# Altium PCB EsoCore_Edge.PcbDoc (part 5 of 6)
Units mil, origin at the board's own origin, x right, y up, seen from the top; angles counter-clockwise.
Board outline 6732.28 x 3385.83 mil, 4 copper layers (Top Layer, Layer 1, Layer 2, Bottom Layer), stack 61.58 mil thick; 330 components, 239 nets, 1236 pads, 712 vias.
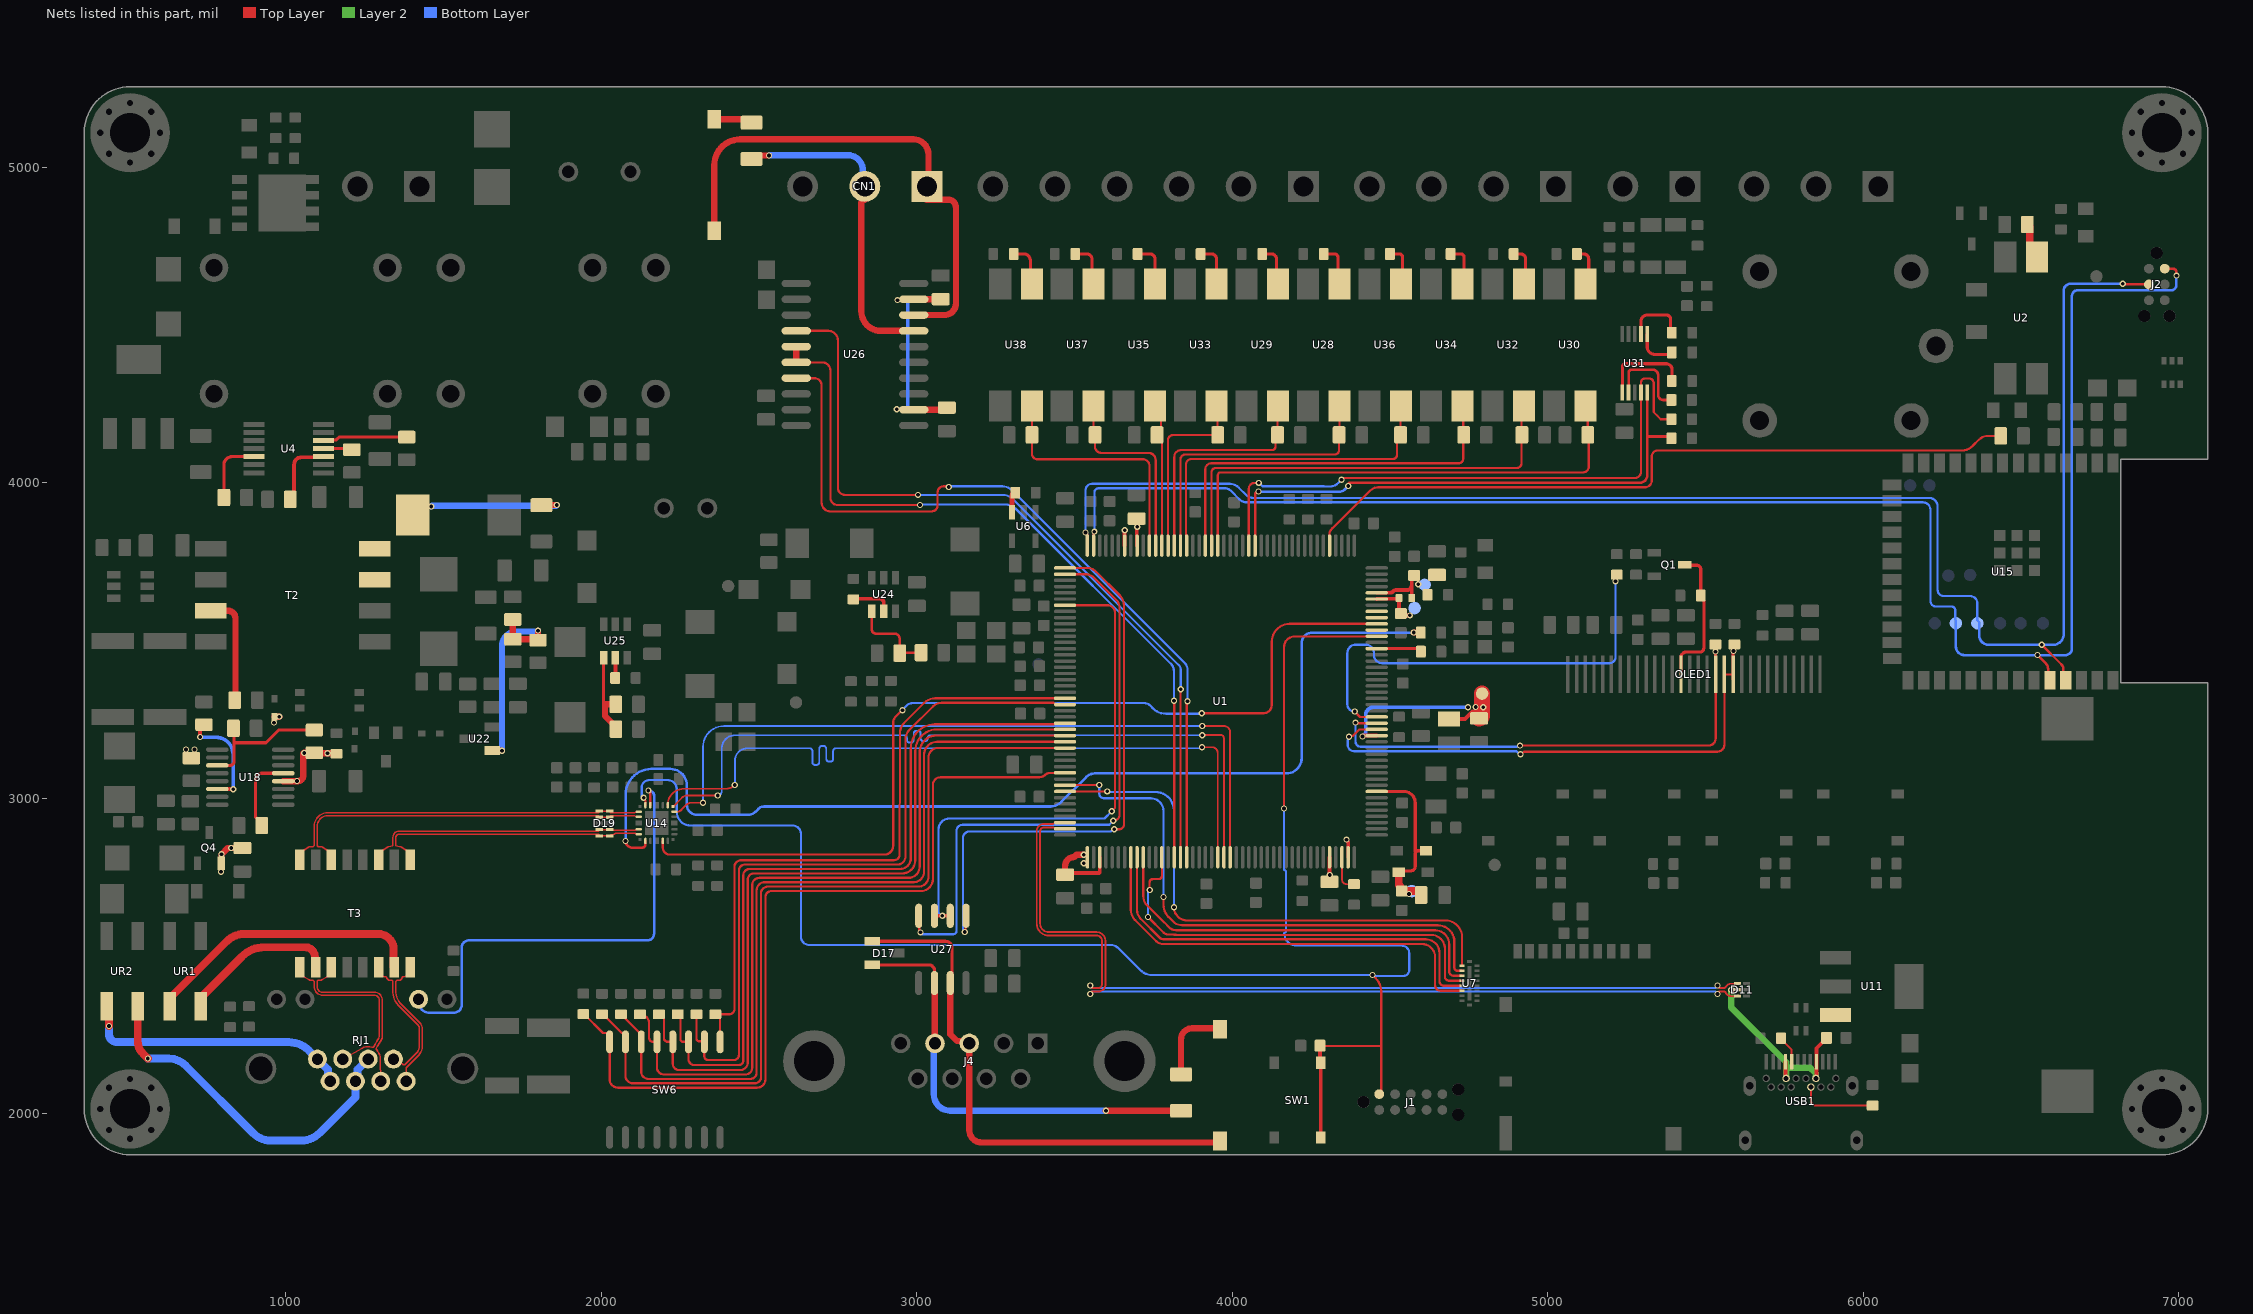
[diagram p6: the nets of this part, all layers, seen from the top]

## Via types
v1: diameter 19.68, hole 11.81, Top Layer to Bottom Layer, tented both sides, 712 vias

## Nets (pads, with @x,y where several pads share a name; then routed paths per layer and width w, separated by ;. In a path a pad name is that pad's centre, name@x,y a point inside that pad or via, vN(x,y) a via of type N, cw(c..) or ccw(c..) an arc to the next point about the centre after c; other vN are vias at no path point) (continued)
NetR26_2: R26.2 U14.13 | length 3374.7
  Top Layer w8: v1(2076.8,2864.7) ccw(c2097.8,2864.7) 2097.8,2843.7 2129.2,2843.7 ccw(c2129.2,2854.23) 2139.73,2854.23 U14.13@2139.73,2865.08
  Top Layer w10: R26.2@4597.49,3525.42 R26.2@4597.57,3525.34
  Top Layer w20: v1(4575.59,3525.5) 4597.57,3525.5 R26.2@4597.57,3525.34
  Bottom Layer w8: v1(2076.8,2864.7) 2076.8,3011.2 cw(c2158.62,3011.2) 2158.62,3093.02 2218.58,3093.02 cw(c2218.58,3040.54) 2271.06,3040.54 2271.06,2979.44 ccw(c2303.1,2979.44) 2303.1,2947.4 2465.16,2947.4 ccw(c2465.16,2979.84) 2488.1,2956.9 2497.6,2966.4 cw(c2516.19,2947.81) 2516.19,2974.1 3423.83,2974.1 ccw(c3423.83,3022.07) 3457.75,2988.15 3537.3,3067.7 cw(c3564.45,3040.55) 3564.45,3078.95 4170.85,3078.95 ccw(c4170.85,3128.1) 4220,3128.1 4220,3491.9 cw(c4253.6,3491.9) 4253.6,3525.5 v1(4575.59,3525.5)
NetR30_2: R30.2 U1.20 | length 1428.3
  Top Layer w7: v1(4388,3275) 4405.12,3257.88 U1.20@4457.93,3257.88
  Bottom Layer w7: v1(4388,3275) cw(c4388,3298.34) 4378.85,3276.87 cw(c4388,3298.34) 4364.66,3298.34 4364.66,3460 cw(c4391.66,3460) 4391.66,3487 4423.06,3487 cw(c4423.06,3461.06) 4449,3461.06 4449,3454.73 ccw(c4475.23,3454.73) 4475.23,3428.5 5196,3428.5 ccw(c5196,3447.3) 5214.8,3447.3 v1(5214.8,3687.87)
NetR32_1: R32.1 SW6.15 U1.118 | length 2656.7
  Top Layer w7: R32.1@2002.12,2315.39 2005.07,2315.39 2064.39,2256.08 2070.11,2256.08 2076.38,2249.81 SW6.15@2076.38,2228 2076.38,2120.62 ccw(c2100.38,2120.62) 2100.38,2096.62 2487,2096.62 ccw(c2487,2115.62) 2506,2115.62 2506,2699 cw(c2527,2699) 2527,2720 3005,2720 ccw(c3005,2752.05) 3037.05,2752.05 3037.05,3129.34 cw(c3067.16,3129.34) 3067.16,3159.45 U1.118@3469.75,3159.45
NetR33_1: R33.1 SW6.16 U1.122 | length 2654.9
  Top Layer w7: R33.1@1940.38,2313.41 R33.1@1942.74,2315.77 1945.69,2315.77 2005.39,2256.08 2019.43,2256.08 2026.38,2249.13 SW6.16@2026.38,2228 2026.38,2108.62 ccw(c2052.38,2108.62) 2052.38,2082.62 2493.62,2082.62 ccw(c2493.62,2109) 2520,2109 2520,2687 cw(c2539,2687) 2539,2706 3013,2706 ccw(c3013,2744.05) 3051.05,2744.05 3051.05,3042.81 cw(c3075,3042.81) 3075,3066.76 3385.41,3066.76 ccw(c3385.41,3099.45) 3391.05,3067.25 3396.42,3068.19 ccw(c3393.76,3083.38) 3404.59,3072.39 ccw(c3393.76,3083.38) 3404.67,3072.47 cw(c3424.55,3052.59) 3424.55,3080.71 U1.122@3469.75,3080.71
NetR36_1: R36.1 U1.31 | length 138.3
  Top Layer w10: U1.31@4457.93,3474.41 R36.1@4596.25,3474.41
NetR41_1: R41.1 USB1.B5 | length 247.2
  Top Layer w7: USB1.B5@5834.45,2084.44 5834.45,2042 ccw(c5850.59,2042) 5850.59,2025.86 R41.1@6029.94,2025.86
NetR42_2: R42.2 USB1.A5 | length 89
  Top Layer w6: R42.2@5739.73,2239.26 5739.73,2236.31 5773.42,2202.62 USB1.A5@5773.42,2164.17
NetR47_1: R47.1 T2.5 T2.6 U17.2 | length 454.2
  Top Layer w20: R47.1@1804.41,3929.56 v1(1858.84,3929.56)
  Bottom Layer w20: v1(1461,3925) 1463,3927 1856.28,3927 v1(1858.84,3929.56)
NetR51_2: R51.2 T2.2 | length 353.7
  Top Layer w20: T2.2@761,3594.43 816.57,3594.43 cw(c816.57,3571) 840,3571 840,3313.52 cw(c837.57,3313.52) R51.2@837.57,3311.1
NetR53_1: R53.1 U18.14 | length 345.4
  Top Layer w12: v1(728,3194.55) 728,3227.57 R53.1@740.1,3227.57 ; U18.14@782.48,3029.5 782.73,3029.25 829.45,3029.25 830.5,3028.2 830.5,3026.5 ccw(c830.5,3029) v1(833,3029)
  Bottom Layer w12: v1(728,3194.55) 729,3193.56 777.44,3193.56 cw(c777.44,3138) 833,3138 v1(833,3029)
NetR54_1: R54.1 R56.2 R61.2 U22.1 | length 680.6
  Top Layer w20: U22.1@1654.37,3151.6 1685,3151.6 v1(1685,3151) ; R54.1@1719,3567 1719.1,3567 R56.2@1719.1,3504.43 1799.1,3504.43 R61.2@1799.1,3501.43 v1(1799.1,3531.64)
  Bottom Layer w20: v1(1685,3151) 1685,3482 cw(c1732,3482) 1732,3529 1796.46,3529 ccw(c1796.46,3531.64) v1(1799.1,3531.64)
NetR57_1: R57.1 R59.2 U18.11 | length 437.4
  Top Layer w10: U18.11@782.48,3104.5 823.5,3104.5 ccw(c823.5,3116.46) 835.46,3116.46 835.46,3176 ; R57.1@833.57,3221.9 835.46,3220.01 835.46,3176 ; R59.2@1090.1,3216.43 977.43,3216.43 937,3176 835.46,3176
NetR58_2: R58.2 U18.5 | length 252.9
  Top Layer w10: R58.2@923.18,2913.66 923.18,2921.04 904,2940.22 904,3060 cw(c923.5,3060) 923.5,3079.5 U18.5@991.52,3079.5
NetR62_1: R62.1 U24.5 | length 132.4
  Top Layer w12: R62.1@2798.74,3630.77 cw(c2800.97,3630.77) 2800.97,3633 2883,3633 cw(c2883,3621) 2895,3621 U24.5@2895,3593
NetR63_1: R63.1 R64.2 U24.4 | length 277.6
  Top Layer w8: U24.4@2857.6,3593 2857.6,3534.4 ccw(c2870,3534.4) 2870,3522 2929.14,3522 cw(c2929.14,3505.3) 2945.84,3505.3 2945.84,3460 R64.2@2946,3460 cw(c2947.9,3460) 2947.9,3461.9 R63.1@3013.57,3461.9
NetR65_1: R65.1 U25.5 | length 65.2
  Top Layer w12: R65.1@2043.77,3381.26 ccw(c2043.77,3382.09) 2044.6,3382.09 U25.5@2044.6,3446
NetR66_1: R66.1 R67.2 U25.4 | length 278.1
  Top Layer w10: U25.4@2007.2,3446 2007.2,3301.92 ccw(c2011.22,3301.92) 2011.22,3297.9
  Top Layer w20: R66.1@2045.57,3297.9 2011.22,3297.9 2011.22,3261.17 2046,3226.38 R67.2@2046,3219
NetR68_1: R68.1 SW7.2 | length 122.6
  Top Layer w20: SW7.2@2358,5153.16 2464.84,5153.16 R68.1@2476,5142
NetR69_1: R69.1 SW8.1 | length 256.1
  Top Layer w20: R69.1@3837.57,2124.75 3837.57,2235.57 cw(c3873,2235.57) 3873,2271 3958.16,2271 cw(c3958.16,2268.16) SW8.1@3961,2268.16
NetR70_1: R70.1 SW6.9 U1.110 | length 2099.7
  Top Layer w7: SW6.9@2376.38,2228 2376.38,2315.39 2404.39,2315.39 ccw(c2404.39,2333) 2422,2333 2422,2783 cw(c2443,2783) 2443,2804 2928,2804 ccw(c2928,2821.43) 2945.43,2821.4 2947.12,3145.14 ; 2947.12,3145 2947.12,3209.32 cw(c2987.68,3209.32) 2959,3238 3023.74,3302.74 cw(c3058,3268.48) 3058,3316.93 U1.110@3469.75,3316.93
NetR71_1: R71.1 SW6.10 U1.111 | length 2336.7
  Top Layer w7: R71.1@2301.38,2315.39 2301.38,2238.62 ccw(c2310.38,2238.62) 2310.38,2229.62 2324.76,2229.62 cw(c2324.76,2228) SW6.10@2326.38,2228 2326.38,2181.93 ccw(c2337.7,2181.93) 2337.7,2170.62 2420.62,2170.62 ccw(c2420.62,2186) 2436,2186 2436,2771 cw(c2455,2771) 2455,2790 2938.05,2790 ccw(c2938.05,2815.95) 2964.01,2815.95 2964.01,3185.63 cw(c3008.37,3185.63) 2977,3217 3052,3292 cw(c3078.39,3265.61) 3078.39,3302.93 3430.46,3302.93 cw(c3430.42,3295.93) 3431.23,3302.88 cw(c3430.42,3295.93) 3433.26,3302.33 ccw(c3456.92,3354.91) U1.111@3456.92,3297.25
NetR72_1: R72.1 SW6.11 U1.114 | length 2393
  Top Layer w7: R72.1@2242.12,2315.39 cw(c2242.12,2307.13) 2250.38,2307.13 2250.38,2236.62 ccw(c2259,2236.62) 2259,2228 SW6.11@2276.38,2228 2276.38,2172.93 ccw(c2294.7,2172.93) 2294.7,2154.62 2436.27,2154.62 ccw(c2436.27,2168.35) 2450,2168.35 2450,2756 cw(c2470,2756) 2470,2776 2947,2776 ccw(c2947,2810.05) 2981.05,2810.05 2981.05,3158.59 cw(c3056.99,3158.59) 3056.99,3234.52 3435.07,3234.52 3438.74,3238.19 U1.114@3469.75,3238.19
NetR73_1: R73.1 SW6.12 U1.115 | length 2457.1
  Top Layer w7: R73.1@2182.38,2315.39 cw(c2182.38,2299.39) 2198.38,2299.39 2198.38,2239.62 ccw(c2210,2239.62) 2210,2228 SW6.12@2226.38,2228 2226.38,2158.62 ccw(c2246.38,2158.62) 2246.38,2138.62 2439.62,2138.62 ccw(c2439.62,2163) 2464,2163 2464,2742 cw(c2484,2742) 2484,2762 2954,2762 ccw(c2954,2803.05) 2995.05,2803.05 2995.05,3149.07 cw(c3064.5,3149.07) 3064.5,3218.51 U1.115@3469.75,3218.51
NetR74_1: R74.1 SW6.13 U1.116 | length 2528.6
  Top Layer w7: R74.1@2122.12,2315.39 cw(c2122.12,2286.13) 2151.38,2286.13 2151.38,2240.62 ccw(c2164,2240.62) 2164,2228 SW6.13@2176.38,2228 2176.38,2146.62 ccw(c2198.38,2146.62) 2198.38,2124.62 2457,2124.62 ccw(c2457,2145.62) 2478,2145.62 2478,2725 cw(c2501,2725) 2501,2748 2974,2748 ccw(c2974,2783.05) 3009.05,2783.05 3009.05,3146.05 cw(c3061.82,3146.05) 3061.82,3198.82 U1.116@3469.75,3198.82
NetR75_1: R75.1 SW6.14 U1.117 | length 2584.3
  Top Layer w7: R75.1@2062.12,2315.39 2064.84,2315.39 2077.05,2303.17 2077.05,2300.46 2126.38,2251.13 SW6.14@2126.38,2228 2126.38,2132.62 ccw(c2148.38,2132.62) 2148.38,2110.62 2473,2110.62 ccw(c2473,2129.62) 2492,2129.62 2492,2708 cw(c2518,2708) 2518,2734 2990,2734 ccw(c2990,2767.05) 3023.05,2767.05 3023.05,3138.05 cw(c3064.14,3138.05) 3064.14,3179.14 U1.117@3469.75,3179.14
NetR76_1: R76.1 U28.1 | length 139
  Top Layer w10: R76.1@4289.96,4725.74 4324.26,4725.74 cw(c4324.26,4715) 4335,4715 4335,4635 ccw(c4340,4635) U28.1@4340,4630
NetR77_1: R77.1 U1.73 U28.4 | length 934.6
  Top Layer w7: U1.73@3835.89,3801.18 3835.89,4074.89 cw(c3851,4074.89) 3851,4090 4324.57,4090 ccw(c4324.57,4104) 4338.57,4104 R77.1@4338.57,4152.09 4340,4152.09 U28.4@4340,4244.18
NetR78_1: R78.1 U29.1 | length 136.9
  Top Layer w10: R78.1@4094.96,4725.74 4124.26,4725.74 cw(c4124.26,4710) 4140,4710 4140,4635 ccw(c4145,4635) U29.1@4145,4630
NetR79_1: R79.1 U30.1 | length 132.5
  Top Layer w10: R79.1@5092.23,4725.74 5114.26,4725.74 cw(c5114.26,4710) 5130,4710 5130,4640 cw(c5120,4640) U30.1@5120,4630
NetR80_1: R80.1 U1.74 U29.4 | length 757.9
  Top Layer w7: U1.74@3816.2,3801.18 3816.2,4082.2 cw(c3838,4082.2) 3838,4104 4126.31,4104 ccw(c4126.31,4114.69) 4137,4114.69 4137,4152.09 R80.1@4143.57,4152.09 4143.57,4244.18 U29.4@4145,4244.18
NetR81_1: R81.1 U1.67 U30.4 | length 1611.5
  Top Layer w7: U1.67@3954,3801.18 3954,4022 cw(c3969,4022) 3956.44,4030.2 cw(c3962.28,4026.34) 3962.24,4033.34 5112.34,4033.34 ccw(c5112.34,4051) 5130,4051 5130,4148.94 R81.1@5126.85,4152.09 5126.85,4237.33 U30.4@5120,4244.18
NetR82_1: R82.1 U1.62 U31.9 | length 1961.9
  Top Layer w7: U1.62@4052.42,3801.18 4052.42,3982.16 cw(c4070.26,3982.16) 4070.26,4000 v1(4084,4000) ; v1(4346,4009.66) 4346,4014 cw(c4347,4014) 4347,4015 5275,4015 ccw(c5275,4035.68) 5295.69,4035.68 U31.9@5295.69,4286.48 5295.69,4318.51 cw(c5308.18,4318.51) 5308.18,4331 5322.18,4331 cw(c5322.18,4317.68) 5335.5,4317.68 5336,4317.18 5336,4240 5336,4224.26 5347.13,4213.13 5358.26,4202 R82.1@5391.7,4202
  Layer 2 w7: v1(4346,4009.66) v1@4349,4009.66
  Bottom Layer w7: v1(4084,4000) 4084.77,4000 4095.77,3989 4291.23,3989 4291.57,3988.66 4310.15,3988.66 ccw(c4310.15,4024.51) 4335.5,3999.16 v1(4346,4009.66)
NetR83_1: R83.1 U1.61 U31.10 | length 1780.4
  Top Layer w8: U1.61@4072.11,3801.18 4072.11,3962.11 cw(c4083,3962.11) v1(4083,3973) ; v1(4368,3990) 4368,3995 cw(c4373.5,3995) 4373.5,4000.5 5293,4000.5 ccw(c5293,4022.88) 5315.38,4022.88 5315.38,4147 ; U31.10@5315.38,4286.48 5315.38,4147 ; R83.1@5389.57,4147 5315.38,4147
  Layer 2 w8: v1@4365,3987 ccw(c4365,3990) v1(4368,3990)
  Bottom Layer w8: v1(4083,3973) 4084,3972 4337.27,3972 ccw(c4337.27,4002.73) 4359,3981 v1(4368,3990)
NetR84_1: R84.1 U31.2 | length 198
  Top Layer w10: U31.2@5295.69,4471.52 5295.69,4512.11 cw(c5315.48,4512.11) 5315.48,4531.9 5376.32,4531.9 cw(c5376.32,4518.65) 5389.57,4518.65 5389.57,4479.84 ccw(c5393.27,4479.84) R84.1@5393.27,4476.14
NetR86_2: R86.2 U31.1 | length 144.6
  Top Layer w10: U31.1@5315.36,4471.52 5315.36,4431.24 ccw(c5339.1,4431.24) 5339.1,4407.51 5384.04,4407.51 ccw(c5384.04,4415.74) 5392.27,4415.74 R86.2@5401.49,4415.74
NetR87_1: R87.1 U32.1 | length 129.6
  Top Layer w10: R87.1@4892.23,4725.74 4914.26,4725.74 cw(c4914.26,4710) 4930,4710 4930,4635 cw(c4925,4635) U32.1@4925,4630
NetR88_2: R88.2 U31.6 | length 294.9
  Top Layer w10: U31.6@5236.64,4286.48 5236.64,4366.64 cw(c5248.1,4366.64) 5248.1,4378.1 ; 5244.6,4377.7 5375.3,4377.7 cw(c5375.3,4359) 5394,4359 5394,4323.47 cw(c5393.27,4323.47) R88.2@5393.27,4322.74
NetR89_2: R89.2 U31.7 | length 285.3
  Top Layer w8: U31.7@5256.31,4286.48 5256.31,4348.31 cw(c5267,4348.31) 5267,4359 5332,4359 cw(c5332,4341) 5350,4341 5350,4279.22 ccw(c5366.48,4279.22) 5366.48,4262.74 R89.2@5392.27,4262.74
NetR90_1: R90.1 U33.1 | length 139
  Top Layer w10: R90.1@3899.96,4725.74 3934.26,4725.74 cw(c3934.26,4710) 3950,4710 U33.1@3950,4630
NetR91_1: R91.1 U1.68 U32.4 | length 1421.5
  Top Layer w7: U1.68@3934.31,3801.18 3934.31,4033.65 cw(c3948,4033.65) 3948,4047.34 4902.34,4047.34 ccw(c4902.34,4062) 4917,4062 4917,4244.18 U32.4@4925,4244.18
NetR92_1: R92.1 U1.75 U33.4 | length 596.6
  Top Layer w7: U1.75@3796.52,3801.18 3796.52,4135.61 cw(c3813,4135.61) 3813,4152.09 R92.1@3953.57,4152.09 3953.57,4244.18 U33.4@3950,4244.18
NetR96_1: R96.1 U34.1 | length 136.8
  Top Layer w10: R96.1@4692.23,4725.74 4724.26,4725.74 cw(c4724.26,4715) 4735,4715 4735,4635 cw(c4730,4635) U34.1@4730,4630
NetR97_1: R97.1 U35.1 | length 144
  Top Layer w10: R97.1@3699.96,4725.74 3739.26,4725.74 cw(c3739.26,4710) 3755,4710 U35.1@3755,4630
NetR98_1: R98.1 U1.69 U34.4 | length 1248.5
  Top Layer w7: U1.69@3914.63,3801.18 3914.63,4043.63 cw(c3933,4043.63) 3933,4062 4718,4062 ccw(c4718,4076) 4732,4076 4732,4244.18 U34.4@4730,4244.18
NetR99_1: R99.1 U1.76 U35.4 | length 471.5
  Top Layer w7: U35.4@3755,4244.18 3774,4225.18 3774,4164.66 R99.1@3761.43,4152.09 3776.83,4152.09 U1.76@3776.83,3801.18
NetR100_1: R100.1 U36.1 | length 134
  Top Layer w10: R100.1@4499.96,4725.74 4529.26,4725.74 cw(c4529.26,4715) 4540,4715 4540,4635 cw(c4535,4635) U36.1@4535,4630
NetR101_1: R101.1 U37.1 | length 144.6
  Top Layer w10: R101.1@3502.23,4725.74 3539.26,4725.74 cw(c3539.26,4710) 3555,4710 3555,4635 ccw(c3560,4635) U37.1@3560,4630
NetR102_1: R102.1 U1.72 U36.4 | length 1112.4
  Top Layer w7: U1.72@3855.57,3801.18 3855.57,3832.19 3853.32,3834.44 3853.32,4057.32 cw(c3872,4057.32) 3872,4076 4510,4076 ccw(c4510,4088) 4522,4088 4522,4152.09 R102.1@4533.57,4152.09 4533.57,4244.18 U36.4@4535,4244.18
NetR103_1: R103.1 U1.77 U37.4 | length 621.8
  Top Layer w7: U37.4@3560,4244.18 3560,4152.09 R103.1@3565,4152.09 3565,4114.69 ccw(c3584.69,4114.69) 3584.69,4095 3734.15,4095 cw(c3734.15,4072) 3757.15,4072 U1.77@3757.15,3801.18
NetR104_1: R104.1 U38.1 | length 142.5
  Top Layer w10: R104.1@3307.23,4725.74 3339.26,4725.74 cw(c3339.26,4705) 3360,4705 3360,4635 ccw(c3365,4635) U38.1@3365,4630
NetR105_1: R105.1 U1.78 U38.4 | length 799.1
  Top Layer w7: U38.4@3365,4244.18 R105.1@3365,4152.09 3365,4092 ccw(c3382,4092) 3382,4075 3716.46,4075 cw(c3716.46,4054) 3737.46,4054 U1.78@3737.46,3801.18
NetR106_1: R106.1 U1.49 | length 2348.9
  Top Layer w7: U1.49@4308.33,3801.18 4308.33,3838 cw(c4329.09,3838) 4314.41,3852.68 4318.39,3856.66 ; 4314.15,3852.94 4317.88,3856.66 4318.39,3856.66 ; R106.1@6436.15,4149 6395,4149 ccw(c6395,4111.04) 6368.16,4137.88 6346.95,4116.68 cw(c6314,4149.63) 6314,4103.03 6164.07,4103.03 5349.9,4103.03 ccw(c5349.9,4083) 5329.88,4083 5329.88,4007.6 cw(c5308.27,4007.6) 5308.27,3986 4462.39,3986 ccw(c4462.39,3950.61) 4437.37,3975.63 4318.39,3856.66
NetR107_1: R107.1 U2.3 | length 115.9
  Top Layer w25: R107.1@6520.43,4819.1 6528.1,4811.42 6528.1,4738.81 U2.3@6551,4715.91
NetR110_2: R110.2 U4.4 | length 91.3
  Top Layer w10: U4.4@1119.02,4108.77 1205.3,4108.77 R110.2@1208.88,4105.19
NetR111_2: R111.2 U4.3 | length 222.7
  Top Layer w12: R111.2@1013.78,3947.77 1025.78,3959.77 1025.78,4057.78 cw(c1049,4057.78) 1049,4081 1093.22,4081 ccw(c1093.22,4083.18) 1095.39,4083.18 U4.3@1119.02,4083.18
NetR112_1: R112.1 U4.12 | length 213.6
  Top Layer w10: R112.1@803.35,3953.67 803.35,4057.34 cw(c829.19,4057.34) 829.19,4083.18 U4.12@898.54,4083.18
NetR115_2: R115.2 U6.3 | length 67.5
  Top Layer w15: U6.3@3301.6,3907.42 3301.6,3958.56 cw(c3312.04,3958.56) R115.2@3312.04,3969
NetR116_2: R116.2 U4.5 | length 268.3
  Top Layer w10: U4.5@1119.02,4134.36 1121.13,4136.46 1159.46,4136.46 1168.19,4145.19 R116.2@1382.88,4145.19
NetRJ1_4: RJ1.4 RJ1.5 UR2.2 | length 1126.6
  Top Layer w25: UR2.2@530.29,2340.65 530.29,2229.72 ccw(c585.01,2229.72) 546.31,2191.03 v1(562.34,2175)
  Bottom Layer w25: v1(562.34,2175) 628.4,2175 cw(c628.4,2098.71) 682.34,2152.66 897.51,1937.49 ccw(c951.8,1991.77) 951.8,1915 1047.8,1915 ccw(c1047.8,2000.21) 1108.05,1939.96 1220.37,2052.28 RJ1.5@1220.37,2103.31 1227.07,2110 1227.07,2139.92 RJ1.4@1260.53,2173.39
NetRJ1_7: RJ1.7 RJ1.8 UR2.1 | length 871.5
  Top Layer w25: UR2.1@431.85,2340.65 438.64,2333.86 438.64,2278.36 v1(439,2278)
  Bottom Layer w25: v1(439,2278) 439,2252.6 ccw(c464.6,2252.6) 464.6,2227 1008.37,2227 cw(c1008.37,2135.47) 1073.09,2200.19 1133.36,2139.92 1133.36,2110 RJ1.7@1140.06,2103.31
NetT3_10: T3.10 UR1.2 | length 501.8
  Top Layer w25: UR1.2@730.07,2340.65 736.86,2347.44 736.86,2374.86 860.71,2498.71 cw(c931.42,2428) 931.42,2528 1061.09,2528 cw(c1061.09,2497.4) 1091.69,2497.4 1091.69,2467.31 T3.10@1094,2465
NetT3_15: T3.15 UR1.1 | length 876.2
  Top Layer w25: UR1.1@631.63,2365.94 812.54,2546.86 cw(c868.41,2490.99) 868.41,2570 1293,2570 cw(c1293,2521.46) 1341.54,2521.46 1341.54,2467.46 T3.15@1344,2465
NetU1_34: U1.34
NetU1_35: U1.35 U14.16 | length 2993.6
  Top Layer w7: U14.16@2194.84,2865.08 2194.84,2843.29 ccw(c2216.63,2843.29) 2216.63,2821.5 2896.75,2821.5 ccw(c2896.75,2849.75) 2925,2849.75 2925,3238.3 cw(c2956.14,3238.3) 2934.12,3260.32 2953.2,3279.4 v1(2954.9,3279.4) ; v1(3903,3270) 4100,3270 ccw(c4100,3295) 4125,3295 4125,3495.6 cw(c4182.55,3495.6) 4182.55,3553.15 U1.35@4457.93,3553.15
  Bottom Layer w7: v1(2954.9,3279.4) 2954.9,3280.9 2968.93,3294.93 cw(c2986,3277.86) 2986,3302 3719.96,3302 cw(c3719.96,3272.93) 3740.51,3293.49 3749.03,3284.97 ccw(c3790,3325.94) 3790,3268 3898,3268 ccw(c3898,3270) 3900,3270 v1(3903,3270)
NetU1_36: U1.36
NetU1_37: U1.37
NetU1_89: U1.89 U27.1 | length 1828.8
  Top Layer w7: v1(3152,2576) 3154,2578 3154,2625.5 U27.1@3156,2627.5 ; U1.89@3469.75,3730.32 3540,3730.32 cw(c3540,3690.05) 3568.46,3718.54 3642.27,3644.73 ; v1(3626,2902) 3641.33,2902 ccw(c3641.33,2917.33) 3656.66,2917.33 3656.66,3610 ccw(c3607.55,3610) 3642.29,3644.71
  Bottom Layer w7: v1(3152,2576) 3146,2576 3146,2873.5 cw(c3167.7,2873.5) 3167.7,2895.2 3615.77,2895.2 3622.57,2902 v1(3626,2902)
NetU1_90: U1.90 U27.4 | length 1907.9
  Top Layer w7: U27.4@3006,2627.5 3007.82,2625.68 v1@3007.82,2582.62 ; U1.90@3469.75,3710.63 3533,3710.63 cw(c3533,3669.5) 3562.07,3698.6 ; 3562.08,3698.58 3632.05,3628.62 cw(c3606.42,3603) 3642.66,3603 3642.66,2948.66 cw(c3623,2948.66) v1(3623,2929)
  Bottom Layer w7: v1(3012,2575) ccw(c3018,2575) 3018,2569 3115,2569 ccw(c3115,2580) 3126,2580 3126,2897.3 cw(c3144.7,2897.3) 3144.7,2916 3610,2916 v1(3623,2929)
NetU1_95: U1.95 U27.2 U27.3 | length 1715
  Top Layer w7: U1.95@3469.75,3612.21 3603.79,3612.21 cw(c3603.79,3587.34) 3628.66,3587.34 3628.66,2969.66 v1(3618,2959)
  Top Layer w12: U27.3@3056,2627.5 v1(3081,2627.5) U27.2@3106,2627.5
  Bottom Layer w7: v1(3081,2627.5) cw(c3081,2639.5) 3069,2639.5 3069,2901.8 cw(c3103,2901.8) 3103,2935.8 3594.8,2935.8 v1(3618,2959)
NetU1_124: U1.124 U7.11 | length 1768.1
  Top Layer w7: U1.124@3470.03,3041.62 3470.41,3042 v1(3578,3042) ; v1(3782,2687) 3782,2673.12 3782,2662.84 ccw(c3837.59,2662.84) 3798.28,2623.53 3812.62,2609.19 ccw(c3840.6,2637.17) 3840.6,2597.6 4651.7,2597.6 cw(c4651.7,2545.3) 4704,2545.3 4704,2463 ccw(c4713.82,2463) 4713.82,2453.18 U7.11@4728.63,2453.18
  Bottom Layer w7: v1(3578,3042) 3578,3016 ccw(c3594,3016) 3594,3000 3742,3000 cw(c3742,2960) 3782,2960 v1(3782,2687)
NetU1_125: U1.125 U7.10 | length 1745.3
  Top Layer w7: U1.125@3469.75,3021.66 3470.08,3021.33 3603.33,3021.33 v1(3604,3022) ; v1(3815,2655) ccw(c3857.04,2655) 3857.04,2612.96 4675.57,2612.96 cw(c4675.57,2559.9) 4728.63,2559.9 U7.10@4728.63,2468.93
  Bottom Layer w7: v1(3604,3022) 3606,3020 3756.53,3020 cw(c3756.53,2961.53) 3815,2961.53 v1(3815,2655)
NetU1_140: U1.140 U7.15 | length 1392.4
  Top Layer w7: U1.140@3678.41,2813 3678.41,2647 ccw(c3725.27,2647) 3692.12,2613.88 ; 3692.13,2613.87 3758.84,2547.16 ccw(c3781.4,2569.71) 3781.4,2537.81 4602.29,2537.81 cw(c4602.29,2497.1) 4643,2497.1 4643,2407 ccw(c4659.81,2407) 4659.81,2390.19 U7.15@4728.63,2390.19
NetU1_141: U1.141 U7.14 | length 1365.4
  Top Layer w7: U1.141@3698.09,2813 3698.09,2646.2 ccw(c3737.2,2646.2) 3709.53,2618.56 3769.55,2558.55 ccw(c3782.93,2571.93) 3782.93,2553 4613.8,2553 cw(c4613.8,2509.8) 4657,2509.8 4657,2420 ccw(c4671.06,2420) 4671.06,2405.94 U7.14@4728.63,2405.94
NetU1_142: U1.142 U7.12 | length 1304.9
  Top Layer w7: U1.142@3717.78,2813 3718,2813 3718,2689 ccw(c3756.63,2689) 3729.3,2661.7 3783.9,2607.1 ; 3784,2607 3800.59,2590.41 ccw(c3821.37,2611.19) 3821.37,2581.8 4643.2,2581.8 cw(c4643.2,2537) 4688,2537 4688,2451 ccw(c4701.57,2451) 4701.57,2437.43 U7.12@4728.63,2437.43
NetU1_145: U1.145 U7.13 | length 1360.6
  Top Layer w7: v1(3733,2624) 3783,2574 ccw(c3797.49,2588.49) 3797.49,2568 3815.57,2567.8 3821.28,2567.8 ccw(c3821.37,2611.19) 3821.33,2567.8 4618.7,2567.02 4630.48,2567.02 cw(c4630.48,2523.5) 4674,2523.5 4674,2435 ccw(c4687.32,2435) 4687.32,2421.68 U7.13@4728.63,2421.68 ; v1(3738.5,2709.5) 3738,2710 3738,2734 cw(c3747.83,2734) 3747.83,2743.83 3766.66,2743.83 ccw(c3766.66,2754) 3776.83,2754 U1.145@3776.83,2813
  Bottom Layer w7: v1(3733,2624) 3733,2700.57 3738.5,2706.07 v1(3738.5,2709.5)
NetU1_147: U1.147 U26.5 U26.6 | length 2492.6
  Top Layer w7: U26.6@2617.78,4382 2700,4382 cw(c2700,4356) 2726,4356 2726,3953 ccw(c2749,3953) 2749,3930 v1(3010,3930) ; v1(3815,3309) 3816.2,3307.8 U1.147@3816.2,2813
  Top Layer w20: U26.6@2617.78,4382 U26.5@2617.78,4432
  Bottom Layer w7: v1(3010,3930) 3011,3931 3281.91,3931 cw(c3281.91,3884.91) 3314.5,3917.5 3805.43,3426.57 cw(c3782.33,3403.47) 3815,3403.47 v1(3815,3309)
NetU1_148: U1.148 U26.4 | length 2543
  Top Layer w7: U26.4@2617.78,4482 2719,4482 cw(c2719,4451) 2750,4451 2750,3984 ccw(c2772,3984) 2772,3962 v1(3004,3962) ; U1.148@3835.89,2813 3835.89,3344.89 v1(3837,3346)
  Bottom Layer w7: v1(3004,3962) 3272.62,3962 cw(c3272.62,3917.62) 3304,3949 3829.22,3423.78 cw(c3810.44,3405) 3837,3405 v1(3837,3346)
NetU1_149: U1.149 U26.7 | length 2546.1
  Top Layer w7: U26.7@2617.78,4332 2675,4332 cw(c2675,4309) 2698,4309 2698,3938 ccw(c2726.34,3938) 2726.34,3909.66 3047,3909.66 ccw(c3047,3928.66) 3066,3928.66 3066,3970.45 cw(c3084.55,3970.45) 3084.55,3989 3099,3989 v1(3101,3987) ; U1.149@3855.57,2813 3855.57,3302.14 3858,3304.57 v1(3858,3308)
  Bottom Layer w7: v1(3101,3987) 3103,3989 3271.32,3989 cw(c3271.32,3946.32) 3301.5,3976.5 3850,3428 cw(c3830.69,3408.69) 3858,3408.69 v1(3858,3308)
NetU1_154: U1.154 U14.1 | length 2411.2
  Top Layer w6: U14.1@2210,2978.26 cw(c2262.24,2978.26) 2262.24,3030.5 2394.61,3030.5 ccw(c2394.61,3070.79) v1(2423.1,3042.3) ; v1@2415.88,3038.13 2420.05,3042.3 v1(2423.1,3042.3) ; v1@2417.41,3036.61 v1(2423.1,3042.3) ; v1(3904,3162) 3936,3162 cw(c3936,3144) 3954,3144 U1.154@3954,2813
  Bottom Layer w6: v1(2423.1,3042.3) 2423.1,3118.33 cw(c2463.62,3118.33) 2463.62,3158.84 2635,3158.84 2660,3158.84 cw(c2660,3150.04) 2668.8,3150.04 2668.8,3114.83 ccw(c2677.6,3114.83) 2677.6,3106.03 2682,3106.03 ccw(c2682,3114.83) 2690.8,3114.83 2690.8,3157.25 cw(c2699.6,3157.25) 2699.6,3166.05 2704,3166.05 cw(c2704,3157.25) 2712.8,3157.25 2712.8,3125.08 ccw(c2721.6,3125.08) 2721.6,3116.28 2726,3116.28 ccw(c2726,3125.08) 2734.8,3125.08 2734.8,3150.04 cw(c2743.6,3150.04) 2743.6,3158.84 2758.52,3158.84 3900.84,3158.84 ccw(c3900.84,3162) v1(3904,3162)
NetU1_155: U1.155 U14.24 | length 2393.6
  Top Layer w6: U14.24@2227.32,2973.83 2255.59,3002.11 cw(c2272.72,2984.98) 2272.72,3009.2 v1(2368.6,3009.2) ; v1(3905,3200) 3906,3201 3963,3201 cw(c3963,3190.32) 3973.68,3190.32 U1.155@3973.68,2813
  Bottom Layer w6: v1(2368.6,3009.2) ccw(c2368.6,3022.2) 2381.6,3022.2 2381.6,3158.3 cw(c2423.3,3158.3) 2423.3,3200 2934.46,3200 2959.46,3200 cw(c2959.46,3191.2) 2968.26,3191.2 2968.26,3185.71 ccw(c2977.06,3185.71) 2977.06,3176.91 2981.46,3176.91 ccw(c2981.46,3185.71) 2990.26,3185.71 2990.26,3205.53 cw(c2999.06,3205.53) 2999.06,3214.33 3003.46,3214.33 cw(c3003.46,3205.53) 3012.26,3205.53 3012.26,3189.87 ccw(c3021.06,3189.87) 3021.06,3181.07 3025.46,3181.07 ccw(c3025.46,3189.87) 3034.26,3189.87 3034.26,3191.2 cw(c3043.06,3191.2) 3043.06,3200 3062.93,3200 v1(3905,3200)
NetU1_156: U1.156 U14.23 | length 2394.2
  Top Layer w6: U14.23@2231.75,2957.1 2239,2957.1 ccw(c2239,2977.98) 2253.76,2963.21 2271.06,2980.52 cw(c2284.54,2967.04) 2284.54,2986.1 v1(2322.3,2986.1) ; v1(3905,3229) 3974,3229 cw(c3974,3209.63) 3993.37,3209.63 U1.156@3993.37,2813
  Bottom Layer w6: v1(2322.3,2986.1) 2322.3,3163.1 cw(c2388.2,3163.1) 2388.2,3229 v1(3905,3229)
PBUS_A: D17.1 J4.3 SW8.2 U27.7 | length 1709.1
  Top Layer w10: D17.1@2858,2546.8 3091.2,2546.8 cw(c3091.2,2527) 3111,2527 3111,2419.5 cw(c3106,2419.5) U27.7@3106,2414.5
  Top Layer w20: U27.7@3106,2414.5 3106,2252.06 3127.57,2230.49 3158.83,2230.49 J4.3@3166.33,2222.99 3166.33,1948 ccw(c3205.33,1948) 3188.13,1913 ccw(c3205.33,1948) 3205.33,1909 3956.16,1909 ccw(c3956.16,1913.84) SW8.2@3961,1913.84
PBUS_B: D17.2 J4.4 R69.2 U27.6 | length 1416.1
  Top Layer w10: D17.2@2858,2472 3038,2472 cw(c3038,2454) 3056,2454 U27.6@3056,2414.5
  Top Layer w20: U27.6@3056,2414.5 3056.45,2414.05 3056.45,2224.21 J4.4@3057.67,2222.99 ; v1(3599.41,2009.59) R69.2@3837.57,2009.59
  Bottom Layer w20: J4.4@3057.67,2222.99 3053.99,2219.32 3053.99,2061.6 ccw(c3106,2061.6) 3106,2009.59 v1(3599.41,2009.59)
PDR_ON: R113.2 U1.174 | length 116.8
  Top Layer w6: U1.174@4347.7,2813 4347.7,2742.8 ccw(c4362.77,2742.8) 4354.81,2730 ccw(c4362.77,2742.8) 4362.77,2727.73 R113.2@4385.74,2727.73
PVCC: C75.1 D13.1 Q4.2 R49.1 R59.1 R60.2 U18.4 | length 337.1
  Top Layer w20: Q4.2@794.4,2794.38 796,2795.97 v1(796,2823) 815.43,2842.43 C75.1@861.81,2842.43 ; D13.1@963.8,3259 v1(979.01,3259) ; U18.4@991.52,3054.5 1037.5,3054.5 ccw(c1037.5,3072) 1055,3072 1055,3141 cw(c1058,3141) v1(1058,3144) ; R59.1@1090.1,3144.57 1091.75,3142.92 1158.61,3142.92 R60.2@1160.26,3141.27
  other v1: 794,2767.44 826.71,2842.43 1035,3055 1131.52,3142.92 683,3155 710,3155 962,3240
R+: RJ1.11 U14.4 | length 1510
  Top Layer w8: v1(2149,3024.5) cw(c2149,3018.03) 2155.47,3018.03 U14.4@2155.47,2978.26
  Bottom Layer w8: RJ1.11@1420.37,2362.76 1420.37,2355.63 ccw(c1456,2355.63) 1456,2320 1532,2320 ccw(c1532,2345) 1557,2345 1557,2526 cw(c1581,2526) 1581,2550 2147,2550 ccw(c2147,2570) 2167,2570 2167,3008.3 ccw(c2150.8,3008.3) 2150.8,3024.5 v1(2149,3024.5)
R_N: RJ1.6 T3.9 | length 578.9
  Top Layer w4.53: T3.9@1044,2465 1056.69,2434.59 1074.38,2424.31 ccw(c1079.04,2432.32) 1079.04,2423.06 1084.7,2423.06 cw(c1084.7,2418.52) 1089.23,2418.52 1089.23,2418.38 1089.23,2403.23 ccw(c1117,2403.23) 1117,2375.47 1281.3,2375.47 cw(c1281.3,2360.77) 1296,2360.77 1296,2248.54 cw(c1268.78,2248.54) 1294.98,2241.16 cw(c1290.62,2242.41) 1294.52,2240.1 1288.03,2229.3 1282.6,2220.26 1278.14,2212.86 ccw(c1290.2,2205.61) 1278.08,2212.75 ; RJ1.6@1180.21,2173.39 1241.33,2207.64 cw(c1260.53,2173.39) 1272.74,2210.71 ccw(c1274.15,2215.01) 1278.06,2212.72
R_P: RJ1.3 T3.11 | length 584.1
  Top Layer w4.53: T3.11@1144,2465 1131.31,2434.59 1113.62,2424.31 cw(c1108.96,2432.32) 1108.96,2423.06 1103.3,2423.06 ccw(c1103.3,2418.52) 1098.77,2418.52 1098.77,2418.38 1098.77,2403.23 ccw(c1117,2403.23) 1117,2385 1281.3,2385 cw(c1281.3,2360.77) 1305.53,2360.77 1305.53,2243.81 cw(c1291.47,2243.81) 1303.52,2236.57 1290.77,2215.35 1289.88,2213.87 1286.32,2207.94 ; 1286.29,2207.9 ccw(c1290.2,2205.61) 1287.13,2202.27 cw(c1260.53,2173.39) 1299.79,2173.89 RJ1.3@1300.68,2103.31
RD_N: D19.5 D19.6 T3.8 U14.7 | length 1191.5
  Top Layer w4.53: T3.8@1044,2805 1056.69,2835.41 1074.38,2845.69 cw(c1079.04,2837.68) 1079.04,2846.94 1084.7,2846.94 ccw(c1084.7,2851.48) 1089.23,2851.48 1089.23,2864 1089.23,2911 cw(c1132.88,2911) 1132.88,2954.65 1988.86,2954.65 ccw(c1988.86,2959.72) D19.6@1993.93,2959.72 D19.5@2026.57,2959.72 2027.38,2957.07 ccw(c2031.58,2958.76) 2031.58,2954.23 2038.56,2954.23 cw(c2038.56,2944.96) 2038.77,2954.23 2051.92,2953.99 ccw(c2052,2958.53) 2052,2953.99 2103.62,2953.99 ccw(c2103.62,2958.53) 2105.32,2954.32 2112.17,2957.1 U14.7@2118.57,2957.1
RD_P: D19.4 D19.7 T3.6 U14.8 | length 1175.9
  Top Layer w4.53: T3.6@1144,2805 1131.31,2835.41 1113.62,2845.69 ccw(c1108.96,2837.68) 1108.96,2846.94 1103.3,2846.94 cw(c1103.3,2851.48) 1098.77,2851.48 1098.77,2864 1098.77,2911 cw(c1132.88,2911) 1132.88,2945.11 1988.86,2945.11 cw(c1988.86,2940.04) D19.7@1993.93,2940.04 D19.4@2026.57,2940.04 cw(c2030.99,2940.04) 2030.99,2944.46 2103.62,2944.46 cw(c2103.62,2939.92) 2105.32,2944.13 2112.17,2941.35 U14.8@2118.57,2941.35
RESET_M#: C1.1 J1.10 SW1.1 SW1.2 U1.33 U14.5 | length 5631.6
  Top Layer w7: v1(2134,3001.5) 2134,2998.07 2139.71,2992.35 U14.5@2139.73,2978.26 ; v1(4164.2,2967.7) 4164.2,3479.1 cw(c4198.1,3479.1) 4198.1,3513 4424.38,3513 4457.16,3513.01 U1.33@4457.93,3513.78 ; C1.1@4278,2216 ccw(c4279,2216) 4279,2215 4472,2215 ; J1.10@4466,2062 4472,2062 4472,2215 ; 4454.7,2429.58 cw(c4412.95,2387.82) 4472,2387.82 4472,2215 ; 4454.7,2429.58 v1(4444.56,2439.73) 4454.7,2429.58
  Top Layer w12: C1.1@4278,2216 4278,2161.11 SW1.1@4280.82,2161.11 SW1.2@4280.82,1924.89
  Bottom Layer w7: v1(2134,3001.5) cw(c2134,3007.5) 2128,3007.5 2128,3034.76 cw(c2151.04,3034.76) 2151.04,3057.8 2209.8,3057.8 cw(c2209.8,3028.6) 2239,3028.6 2239,2956.82 ccw(c2282.02,2956.82) 2282.02,2913.8 2606.4,2913.8 cw(c2606.4,2887.8) 2632.4,2887.8 2632.4,2562.3 ccw(c2659.7,2562.3) 2659.7,2535 3614.15,2535 cw(c3614.15,2499.15) 3639.5,2524.5 3708.5,2455.5 ccw(c3746.58,2493.58) 3746.58,2439.73 v1(4444.56,2439.73) 4444.56,2439.42 4447.68,2436.29 4540.71,2436.29 ccw(c4540.71,2456.59) 4561,2456.59 4561,2509 ccw(c4537,2509) 4537,2533 4204,2533 cw(c4204,2572) 4165,2572 4170.8,2577.8 4170.8,2767.73 4164.2,2774.33 v1(4164.2,2967.7)
RST#: OLED1.14 Q1.3 R11.1 | length 469.5
  Top Layer w10: OLED1.14@5422.37,3392.94 5422.37,3446.68 cw(c5439.68,3446.68) 5439.68,3463.99 5484.41,3463.99 ccw(c5484.41,3473.99) 5493.67,3470.2 ccw(c5477,3477) 5495,3477 5495,3624 ccw(c5484,3624) 5484,3635 5476.51,3635 R11.1@5484.25,3642.74 ; Q1.3@5434.62,3741 ccw(c5436.62,3741) 5436.62,3739 5472,3739 cw(c5472,3725.77) 5485.23,3725.77 R11.1@5485.23,3642.74
RTU_A: CN1.1 SW7.1 U26.18 | length 1676.2
  Top Layer w20: SW7.1@2358,4798.84 2358,4956.7 2357.99,5006.82 cw(c2440.17,5006.82) 2440.17,5089 2989,5089 cw(c2989,5041) 3037,5041 3037,4945.71 cw(c3032,4945.71) CN1.1@3032,4940.71 ; U26.18@2990.22,4532 3087,4532 ccw(c3087,4569) 3124,4569 3124,4873 ccw(c3099,4873) 3099,4898 3032,4898 3032,4897.76 cw(c3032,4903.76) 3026,4903.76 CN1.1@3026,4940.71
RTU_B: CN1.2 R68.2 U26.17 | length 999.7
  Top Layer w20: R68.2@2476,5026.84 2487.16,5038 v1(2531.5,5038) ; CN1.2@2835.15,4897.76 ccw(c2835.15,4886.61) 2824,4886.61 2824,4544 ccw(c2886,4544) 2886,4482 U26.17@2990.22,4482
  Bottom Layer w20: v1(2531.5,5038) 2532.23,5038.73 2781.21,5038.73 cw(c2781.21,4991) 2828.94,4991 2828.94,4946.92 CN1.2@2835.15,4940.71
RX0: J2.2 TP2.1 U1.87 U15.36 | length 5405.4
  Top Layer w8: U1.87@3560.3,3801.18 3560.3,3834.24 cw(c3579.76,3834.24) 3564.77,3846.65 v1(3562.83,3845.44) ; v1(6553,3454) 6578.46,3428.54 cw(c6559.92,3410) 6586.14,3410 6586.14,3379.88 U15.36@6592,3374.02 ; J2.2@6956,4679 6982,4679 cw(c6982,4668) 6993,4668 v1(6993,4657)
  Layer 2 w8: v1(3562.83,3845.44) 3563.94,3845.44 cw(c3563.94,3843.94) v1@3565,3845
  Bottom Layer w7: v1(3562.83,3845.44) 3562.83,3968.78 cw(c3577.05,3968.78) 3577.05,3983 3975.89,3983 cw(c3975.89,3954.89) 3995.77,3974.77 4022.27,3948.27 ; 4022.29,3948.24 ccw(c4046.23,3972.23) 4046.23,3938.34 6189.66,3938.34 cw(c6189.66,3914.92) 6213.08,3914.92 6213.08,3626 ccw(c6231.08,3626) 6231.08,3608 6280,3608 cw(c6280,3596) 6292,3596 6292,3565 TP2.1@6294,3563
  Bottom Layer w8: TP2.1@6294,3563 TP2.1@6294,3555 6294,3481 ccw(c6321,3481) 6321,3454 v1(6553,3454) 6641,3454 ccw(c6641,3475) 6662,3475 6662,4593 cw(c6679.16,4593) 6679.16,4610.16 6975.16,4610.16 ccw(c6975.16,4628) 6993,4628 v1(6993,4657)
SCL2: OLED1.18 R27.1 U1.19 | length 1590.3
  Top Layer w7: v1(4391,3240) 4392.81,3238.19 U1.19@4457.93,3238.19 ; v1(4912,3167) 5509,3167 ccw(c5509,3190.6) 5532.6,3190.6 OLED1.18@5532.6,3392.94
  Top Layer w10: R27.1@5531.74,3486.77 5532.13,3486.77 OLED1.18@5532.13,3392.94
  Bottom Layer w7: v1(4391,3240) 4391,3179.41 ccw(c4406.75,3179.41) 4406.75,3163.66 4901.56,3163.66 4902.47,3164.57 4909.57,3164.57 v1(4912,3167)
  other v1: 5532,3465
SDA2: OLED1.19 OLED1.20 R28.1 U1.18 | length 1714.3
  Top Layer w7: v1(4370,3195) 4372.38,3197.38 4382.38,3197.38 4403.51,3218.51 U1.18@4457.93,3218.51 ; v1(4914,3140) 4916.57,3140 4924.44,3147.87 5538,3147.87 ccw(c5538,3170.03) 5560.16,3170.03 OLED1.19@5560.16,3392.94 OLED1.20@5587.72,3392.94
  Top Layer w10: OLED1.20@5587.25,3376.99 5587.25,3483.28 cw(c5591.74,3483.28) R28.1@5591.74,3487.77
  Bottom Layer w7: v1(4370,3195) 4367.57,3192.57 4367.57,3186.13 4366,3184.56 4366,3169 ccw(c4385.66,3169) 4385.66,3149.34 4901.22,3149.34 4910.57,3140 v1(4914,3140)
  other v1: 5589,3467
T_N: RJ1.2 T3.14 | length 429.4
  Top Layer w4.53: T3.14@1294,2465 1294,2456.26 ccw(c1315.67,2456.26) 1300.35,2440.94 ccw(c1315.67,2456.26) 1315.67,2434.59 1315.89,2434.57 cw(c1315.43,2430.06) 1319.9,2430.81 ccw(c1329.04,2432.32) 1329.04,2423.06 1334.7,2423.06 cw(c1334.7,2418.52) 1339.23,2418.52 1339.23,2383.93 ccw(c1395.15,2383.93) 1355.61,2344.39 1376.79,2323.21 1408,2292 1418.05,2281.95 cw(c1406.1,2270) 1423,2270 1423,2214 cw(c1391.62,2214) 1413.81,2191.81 1377,2155 cw(c1377,2170.11) 1366.32,2159.43 1360.5,2165.24 ccw(c1340.84,2145.59) RJ1.2@1340.84,2173.39
T_P: RJ1.1 T3.16 | length 440.7
  Top Layer w4.53: RJ1.1@1381,2103.31 1381,2141.64 cw(c1390.36,2141.64) 1383.74,2148.25 1420.56,2185.07 ccw(c1391.65,2213.99) 1432.53,2213.99 1432.53,2270.03 ccw(c1406.17,2270.03) 1424.81,2288.67 1386.33,2327.16 1362.4,2351.08 cw(c1395.32,2384) 1348.77,2384 1348.77,2418.52 cw(c1353.3,2418.52) 1353.3,2423.06 1358.96,2423.06 ccw(c1358.96,2432.32) 1368.1,2430.79 cw(c1372.57,2430.06) 1372.11,2434.57 1372.33,2434.59 ccw(c1372.33,2456.26) 1387.65,2440.94 ccw(c1372.33,2456.26) 1394,2456.26 T3.16@1394,2465
TD_N: D19.2 D19.9 T3.3 U14.10 | length 890.1
  Top Layer w4.53: T3.3@1294,2805 1306.69,2835.41 1324.38,2845.69 cw(c1329.04,2837.68) 1326.64,2846.63 1339.23,2850 1339.23,2877 cw(c1357.83,2877) 1357.83,2895.59 1988.85,2895.59 ccw(c1988.85,2900.67) D19.9@1993.93,2900.67 D19.2@2026.57,2900.67 ccw(c2030.9,2905) 2030.9,2898.88 2105.97,2898.88 ccw(c2105.97,2904.17) 2109.72,2900.43 cw(c2113.46,2896.68) 2113.46,2901.98 U14.10@2118.57,2901.98
TD_P: D19.1 D19.10 T3.1 U14.11 | length 876.8
  Top Layer w4.53: T3.1@1394,2805 1381.31,2835.41 1363.62,2845.69 ccw(c1358.96,2837.68) 1361.36,2846.63 1348.77,2850 1348.77,2877 cw(c1357.83,2877) 1357.83,2886.06 1988.85,2886.06 cw(c1988.85,2880.98) D19.10@1993.93,2880.98 D19.1@2026.57,2880.98 2028.93,2883.63 cw(c2030.87,2879.53) 2029.74,2883.93 2040.81,2886.76 ccw(c2038.56,2895.75) 2040.91,2886.79 ccw(c2038.56,2895.75) 2043.63,2887.99 2044.57,2888.6 cw(c2047.05,2884.81) 2047.05,2889.34 2105.97,2889.34 cw(c2105.97,2884.05) 2109.72,2887.79 ccw(c2113.46,2891.54) 2113.46,2886.24 U14.11@2118.57,2886.24
TX0: J2.3 TP3.1 U1.88 U15.37 | length 5260.3
  Top Layer w8: v1(3535,3843) 3538,3840 cw(c3531.7,3833.7) 3540.61,3833.7 U1.88@3540.61,3801.18 ; v1(6566,3487) 6627.93,3425.07 cw(c6610.86,3408) 6635,3408 6635,3381.02 U15.37@6642,3374.02 ; v1(6823,4631) 6825,4629 J2.3@6906,4629
  Bottom Layer w7: v1(3535,3843) 3535,3977 cw(c3555,3977) 3555,3997 3992.03,3997 cw(c3992.03,3956.03) 4021,3985 4044.5,3961.5 ccw(c4066.61,3983.61) 4066.61,3952.34 6208.66,3952.34 cw(c6208.66,3925) 6236,3925 6236,3661 ccw(c6256,3661) 6256,3641 6340,3641 cw(c6340,3619) 6362,3619 TP3.1@6362,3564
  Bottom Layer w8: TP3.1@6362,3564 6368,3558 6368,3516 ccw(c6397,3516) 6397,3487 v1(6566,3487) 6603,3487 ccw(c6603,3520) 6635,3511.94 ccw(c6603,3520) 6636,3520 6636,4610 cw(c6657,4610) 6657,4631 v1(6823,4631)
USB_N: D11.4 U1.130 | length 2891.1
  Top Layer w5.86: U1.130@3469.75,2923.23 3439.83,2923.23 3433.2,2919.56 cw(c3430.36,2924.68) 3430.36,2918.82 3403,2918.82 ccw(c3403,2895.96) 3380.14,2895.96 3380.14,2603 ccw(c3418.14,2603) 3418.14,2565 3570,2565 cw(c3570,2548) 3587,2548 3587,2518 3587,2409.68 cw(c3576,2409.68) 3576,2398.68 3557.91,2398.68 cw(c3557.91,2406.59) v1(3550,2406.59) ; v1(5538,2406.59) ccw(c5545.91,2406.59) 5545.91,2398.68 5558.65,2398.68 ccw(c5558.65,2404.54) 5563.15,2400.79 5566.82,2405.19 cw(c5582.01,2392.52) 5571.75,2409.43 ; 5571.78,2409.45 cw(c5582.01,2392.52) 5582.07,2412.3 ; 5582.09,2412.3 5594.25,2412.3 D11.4@5601.65,2412.94
  Bottom Layer w5.86: v1(3550,2406.59) ccw(c3557.91,2406.59) 3557.91,2398.68 5530.09,2398.68 ccw(c5530.09,2406.59) v1(5538,2406.59)
USB_P: D11.6 U1.131 | length 2893.7
  Top Layer w5.86: U1.131@3469.75,2903.55 3439.83,2903.55 3433.2,2907.22 ccw(c3430.36,2902.1) 3430.36,2907.96 3403,2907.96 ccw(c3403,2895.96) 3391,2895.96 3391,2603 ccw(c3418.14,2603) 3418.14,2575.86 3570,2575.86 cw(c3570,2548) 3597.86,2548 3597.86,2518 3597.86,2409.68 cw(c3576,2409.68) 3576,2387.82 3557.91,2387.82 ccw(c3557.91,2379.91) v1(3550,2379.91) ; v1(5538,2379.91) cw(c5545.91,2379.91) 5545.91,2387.82 5558.65,2387.82 cw(c5558.65,2381.96) 5563.99,2384.39 ccw(c5582.01,2392.52) 5570.8,2376.23 ccw(c5582.01,2392.52) 5582.01,2372.75 5594.25,2372.75 D11.6@5601.65,2373.57 ; D11.6@5601.67,2373.15 D11.6@5603.05,2373.23
  Bottom Layer w5.86: v1(3550,2379.91) cw(c3557.91,2379.91) 3557.91,2387.82 5530.09,2387.82 cw(c5530.09,2379.91) v1(5538,2379.91)
VBAT: C29.2 C30.1 D3.1 D4.1 U1.8 VBAT_.1 | length 566.2
  Top Layer w10: U1.8@4457.93,3021.66 4544.34,3021.66 cw(c4544.34,2986) 4580,2986 4580,2830.18 cw(c4583.82,2830.18) 4583.82,2834 4591,2834 ; D3.1@4527.84,2766.01 4531.83,2770 4566,2770 ccw(c4566,2784) 4580,2784 4580,2823 cw(c4591,2823) 4591,2834 ; D4.1@4614.16,2834 4591,2834
  Top Layer w25: D3.1@4527.84,2766.01 4527.84,2725.63 C30.1@4531.28,2722.19 ; C30.1@4537.48,2705.77 4586.05,2705.77 cw(c4586.05,2693.19) C29.2@4598.62,2693.19
  other v1: 4560.29,2696.36
VBUS: C3.1 D11.5 U11.3 USB1.A4 USB1.A9 USB1.B4 USB1.B9 | length 690
  Top Layer w6: v1(5582.01,2392.52) 5582.19,2392.25 5600.65,2392.25 ccw(c5600.65,2393.25) D11.5@5601.65,2393.25
  Top Layer w12: USB1.A4@5753.73,2164.17 5753.73,2113.98 ccw(c5755.71,2113.98) USB1.B9@5755.71,2112 ; USB1.B4@5850.19,2112 ccw(c5850.19,2113.97) 5852.16,2113.97 USB1.A9@5852.16,2164.17 5852.16,2207.42 5884.23,2239.5 C3.1@5884.23,2240.48
  Layer 2 w20: v1(5582.01,2392.52) 5582.01,2336.99 5755.71,2163.29 5755.71,2146 5755.71,2137.65 ; USB1.B9@5755.71,2112 5755.71,2137.65 ; USB1.B4@5850.19,2112 5849.5,2112.69 5849.5,2127.98 5831.47,2146 5764.06,2146 5755.71,2137.65
VDD_ISO: C93.2 C94.2 U26.12 U26.19 | length 608.2
  Top Layer w20: U26.12@2990.22,4232 3088.2,4232 ccw(c3088.2,4238.8) C94.2@3095,4238.8 ; U26.19@2990.22,4582 3075.81,4582 C93.2@3075.81,4582.62
  Bottom Layer w12: v1(2936.13,4233.1) 2971,4233.1 2971,4579.28 v1(2938.74,4579.28)
VDD_SDC: C12.2 C22.2 C23.2 C25.2 L3.1 U1.17 U1.80 U1.82 U1.133 U1.135 U1.172 U1.175 VDD_SDC_.1 | length 1163.5
  Top Layer w10: C12.2@4308.19,2735.38 4309,2736.19 v1(4309,2757)
  Top Layer w12: C22.2@3470,2758 cw(c3475,2758) 3475,2763 3576,2763 ccw(c3576,2766.98) 3579.98,2766.98 U1.135@3579.98,2813 ; U1.82@3658.72,3801.18 3658.72,3850 v1(3659,3850) ; C23.2@3696.81,3886.62 3697.01,3872.94 3697.2,3860.51 U1.80@3698.09,3801.18 ; U1.172@4308.33,2813 4308.33,2757 v1(4309,2757) ; v1(4362,2869) 4362,2866.92 4367.38,2861.54 U1.175@4367.38,2813 ; v1(4413,3196) 4415.82,3198.82 U1.17@4457.93,3198.82 ; L3.1@4687,3251.37 4737.37,3251.37 4762,3276
  Top Layer w20: C22.2@3470,2758 3470,2785 cw(c3499,2785) 3499,2814 3506,2821 v1(3529,2821)
  Top Layer w50: C25.2@4782.19,3253.38 ccw(c4782.19,3263.19) 4792,3263.19 VDD_SDC_.1@4792,3332
  Bottom Layer w12: v1(4413,3196) 4413,3196.87 4423,3206.87 4423,3263 cw(c4449,3263) 4449,3289 v1(4747,3289)
  other v1: 3529,2794 4795.35,3288.47 4771.52,3289.46 3698.7,3860.51
VDDA: C27.2 C28.1 L2.1 R4.2 U1.40 VDDA_.1 | length 194.4
  Top Layer w12: U1.40@4457.93,3651.58 4500.49,3651.58 ccw(c4500.44,3663.58) 4509.29,3655.47 cw(c4520.87,3644.94) 4520.87,3660.6 4536.81,3660.6 4555.42,3660.6 ccw(c4555.42,3672.6) 4567.42,3672.35 ; R4.2@4569,3635 4569,3698.9 cw(c4576.52,3698.9) C28.1@4576.52,3706.43
  other v1: 4589.92,3678.54
VREF+: C41.1 R4.1 U1.39 VREF+_.1 | length 158.9
  Top Layer w12: U1.39@4457.93,3631.89 4458.42,3632.38 4526.22,3632.38 R4.1@4528.84,3635 4528.84,3585.77 C41.1@4534.48,3585.77 ccw(c4540.24,3585.77) 4540.24,3580 v1(4563,3580)
pads on no net: J1. J1.7 J2. J4.1 J4.2 J4.6 J4.7 J4.8 J4.9 OLED1.7 T3.4 T3.5 T3.12 T3.13 U1.1 U1.2 U1.3 U1.4 U1.5 U1.9 U1.21 U1.22 U1.23 U1.26 U1.32 U1.43 U1.46 U1.50 U1.51 U1.55 U1.56 U1.57 U1.58 U1.59 U1.60 U1.63 U1.66 U1.79 U1.85 U1.86 U1.91 U1.94 U1.96 U1.97 U1.98 U1.103 U1.104 U1.106 U1.107 U1.123 U1.127 U1.128 U1.129 U1.143 U1.144 U1.150 U1.153 U1.157 U1.158 U1.161 U1.164 U1.165 U1.166 U1.168 U1.169 U1.170 U1.171 U4.1 U4.6 U4.10 U4.13 U4.14 U6.4 U7.2 U14.12 U15.4 U15.5 U15.6 U15.7 U15.8 U15.9 U15.12 U15.15 U15.16 U15.17 U15.18 U15.19 U15.20 U15.21 U15.22 U15.23 U15.24 U15.25 U15.26 U15.28 U15.29 U15.30 U15.31 U15.32 U15.33 U15.34 U15.35 U15.38 U15.39 U18.6 U18.15 U26.13 U26.15 USB1.A2 USB1.A3 USB1.A8 USB1.A10 USB1.A11 USB1.B2 USB1.B3 USB1.B8 USB1.B10 USB1.B11

## Polygon pours and split planes (outlines as drawn)
3V3 on Top Layer "NONET_L-01_P-001" (solid, pour order 0): 3536.2,3860.6 3576.9,3860.6 cw(c3576.9,3856.4) 3581.1,3856.4 3581.1,3848.9 ccw(c3583.9,3848.9) 3583.9,3846.1 3626.72,3846.1 ccw(c3626.72,3852.53) 3633.14,3852.53 3633.14,3890.53 ccw(c3623.24,3890.53) 3623.24,3900.43 3535.49,3900.43 ccw(c3535.49,3895.37) 3530.42,3895.37 3530.42,3863.3 ccw(c3533.12,3863.3) 3533.12,3860.6
3V3 on Top Layer "NONET_L-01_P-001" (solid, pour order 14): 4775.3,3441.85 4775.3,3497.15 cw(c4786.1,3497.15) 4786.1,3507.95 4933.7,3507.95 cw(c4933.7,3494.05) 4947.6,3494.05 4947.6,3444.35 cw(c4936.2,3444.35) 4936.2,3432.95 4781.6,3432.95 cw(c4781.6,3439.35) 4775.2,3439.35
NetD2_1 on Top Layer "NONET_L-01_P-001" (solid, pour order 15): 2085.3,4167.9 2085.3,4203.52 ccw(c2074.91,4203.52) 2074.91,4213.91 1967.5,4213.91 ccw(c1967.5,4202.41) 1956.01,4202.41 1956.01,4065.08 ccw(c1967.06,4065.08) 1967.06,4054.03 2068.55,4054.03 ccw(c2068.55,4069.77) 2084.3,4069.77
+24v on Top Layer "NONET_L-01_P-001" (solid, pour order 24): 2001.2,5046.3 cw(c2001.2,5039.3) 2008.2,5039.3 2008.2,4922 ccw(c2026.9,4922) 2026.9,4903.3 2196.1,4903.3 ccw(c2196.1,4925.9) 2218.7,4925.9 2218.7,5185 ccw(c2182.5,5184.7) 2182.2,5220.9 1577.2,5220.9 ccw(c1577.2,5205.6) 1561.9,5205.6 1561.9,5053.9 ccw(c1568.8,5053.9) 1568.8,5047 1595.6,5046.3